# Altium PCB PCB1.PcbDoc
Units mil, origin at the board's own origin, x right, y up, seen from the top; angles counter-clockwise.
Board outline 984.25 x 984.25 mil, 2 copper layers (Top Layer, Bottom Layer); 60 components, 53 nets, 239 pads, 136 vias.
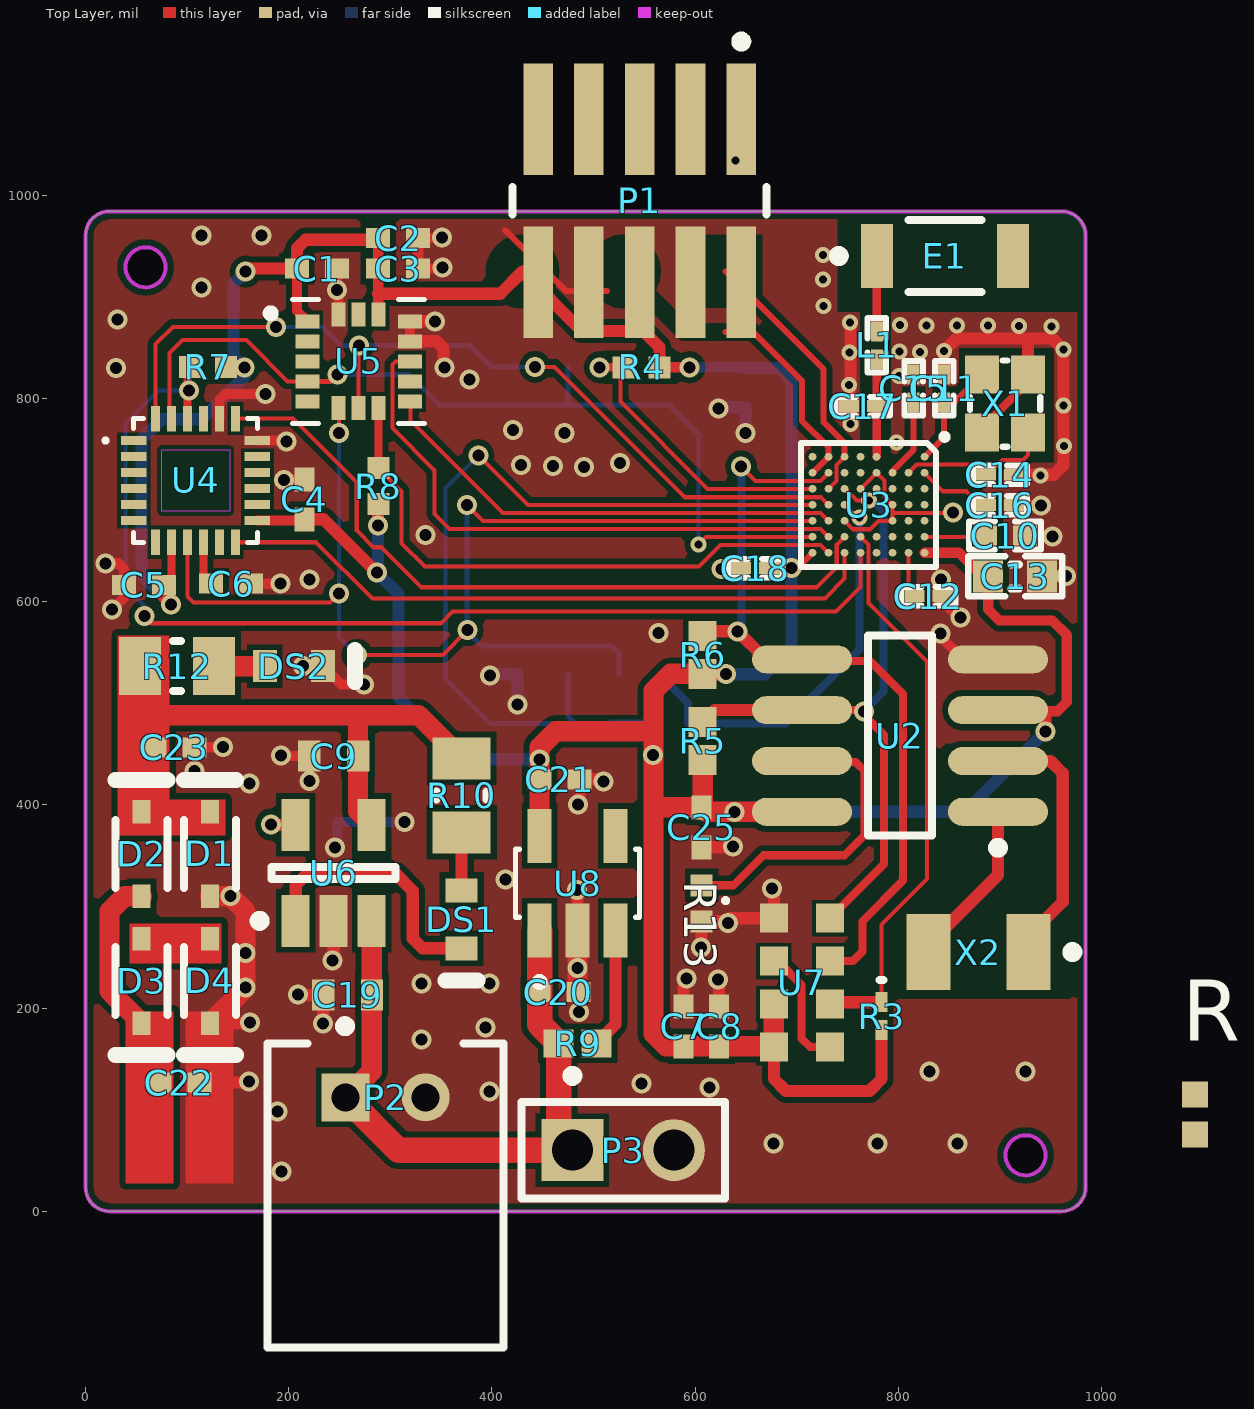
[diagram p0: Top Layer view]
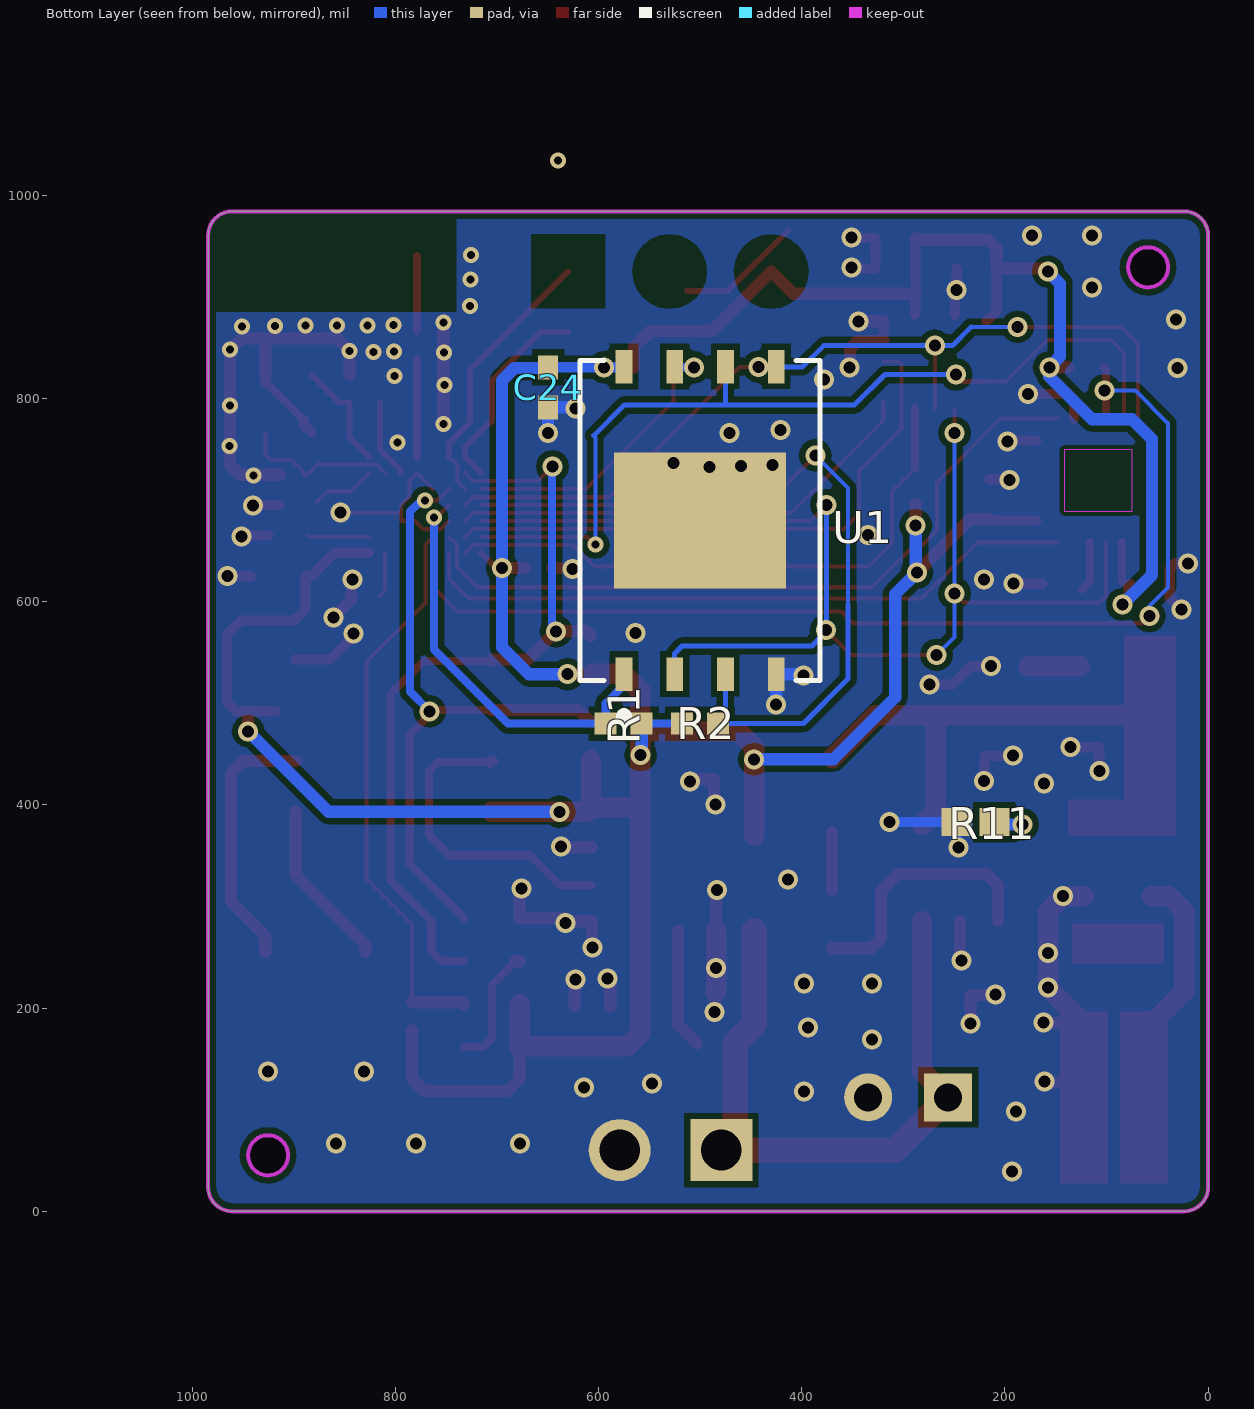
[diagram p1: Bottom Layer view, seen from below]

## Layer stack, top to bottom
Top Solder: solder mask 0.4, Solder Resist, Dk 3.5
Top Layer: signal copper 1.4
Dielectric1: dielectric 12.6, FR-4, Dk 4.8
Bottom Layer: signal copper 1.4
Bottom Solder: solder mask 0.4, Solder Resist, Dk 3.5

## Board outline
0,23.62 0,960.63 cw(c23.62,960.63) 23.62,984.25 960.63,984.25 cw(c960.63,960.63) 984.25,960.63 984.25,23.62 cw(c960.63,23.62) 960.63,0 23.62,0 cw(c23.62,23.62)
cut-out: 905.51,55.12 ccw(c925.2,55.12) 925.2,35.43 ccw(c925.2,55.12) 944.88,55.12 ccw(c925.2,55.12) 925.2,74.8 ccw(c925.2,55.12)
cut-out: 59.06,909.45 cw(c59.06,929.13) 39.37,929.13 cw(c59.06,929.13) 59.06,948.82 cw(c59.06,929.13) 78.74,929.13 cw(c59.06,929.13)

## Design rules (kind name [scope] priority, off if disabled: settings)
Clearance Clearance_1 [InComponentClass('p')] p1: gap=3.94 ignorepadtopadclearanceinfootprint=FALSE except(0: Arc-Hole Track-Hole SMDPad-Hole THPad-Hole Via-Hole Fill-Hole Poly-Hole Region-Hole Text-Hole)
Clearance [All] p2: gap=5.91 ignorepadtopadclearanceinfootprint=FALSE except(0: Arc-Hole Track-Hole SMDPad-Hole THPad-Hole Via-Hole Fill-Hole Poly-Hole Region-Hole Text-Hole)
PolygonConnect [All] p1: connectstyle=Direct reliefconductorwidth=10 reliefentries=4 polygonreliefangle="90 Angle" airgapwidth=10
RoomDefinition "SimPL_IMU_v1_1 _OCT31" [InComponentClass('SimPL_IMU_v1_1 _OCT31')] p1: confinementstyle=ConfineIn formatcopy=TRUE lockcomponents=FALSE outline 1029.25,55.01 1209.35,55.01 1209.35,249.83 1029.25,249.83
RoomDefinition "SimPL_IMU_v1_0 _OCT31" [InComponentClass('SimPL_IMU_v1_0 _OCT31')] p2: confinementstyle=ConfineIn formatcopy=TRUE lockcomponents=FALSE outline -2480,-2300 -480,-2300 -480,-1300 -2480,-1300
RoutingVias [All] p1: holewidth=11.81 width=19.68 viastyle="Through Hole" minholewidth=11.81 minwidth=19.68 maxholewidth=11.81 maxwidth=19.68
SilkToSolderMaskClearance SilkscreenOverComponentPads [IsPad] p1: minsilkscreentomaskgap=10 clearancetoexposedcopper=TRUE
SolderMaskExpansion [All] p1: expansion=4
Width [All] p1: maxlimit=1000 minlimit=4 preferedwidth=10
29 further rules are at their usual default settings.

## Classes and differential pairs
component class "SimPL_IMU_v1_1 _OCT31": C10 C11 C12 C13 C14 C15 C16 C17 C18 C24 C25 C? E1 L1 P1 R1 R2 R4 R5 R6 R13 R14 U1 U2 U3 X1 X2
component class "SimPL_IMU_v1_0 _OCT31": C1 C2 C3 C4 C5 C6 C7 C8 C9 C19 C20 C21 C22 C23 D1 D2 D3 D4 DS1 DS2 P2 P3 R3 R7 R8 R9 R10 R11 R12 U4 U5 U6 U7 U8

## Components (designator, comment, footprint, x,y, rotation, side; value= is the part's Value field where it differs from the comment)
C1 "0.1uF" 0402 227.72,927.87 r0 top
C2 "0.1uF" 0402 307.72,957.87 r0 top
C3 "1.0uF" 0402 307.72,927.87 r0 top
C4 "0.1uF" 0402 215.39,700.79 r90 top
C5 "0.1uF" 0402 57.48,616.54 r180 top
C6 "0.1uF" 0402 143.31,617.72 r0 top
C7 "0.1uF" 0402 588.52,181.99 r90 top
C8 "2.2uF" 0402 623.52,181.99 r90 top
C9 "4.7uF" CAPC1005X65X10ML15 244.17,448.03 r0 top
C10 "1.0µF" CAPC1005X04L 905,665 r180 top
C11 "12pF" CAPC0603X03L 845,810 r270 top
C12 "100nF" CAPC0603X03L 829.53,605.51 r0 top
C13 "4.7µF" CAPC1608X06L 915,625 r0 top
C14 "12pF" CAPC0603X03L 900,725 r180 top
C15 "100pF" CAPC0603X03L 815,810 r90 top
C16 "100pF" CAPC0603X03L 900,695 r180 top
C17 "1.0pF" CAPC0603X03L 764.96,792.52 r0 top
C18 "100nF" CAPC0603X03L 659.06,633.07 r180 top
C19 "4.7uF" CAPC1005X65X10ML15 257.87,212.99 r0 top
C20 "1uF" 0402 465.35,215.75 r0 top
C21 "1uF" 0402 466.54,425.2 r0 top
C22 "6.8nF" 0402 92.4,126.65 r0 top
C23 "220uF" 0402 87.4,456.65 r0 top
C24 "0.1uF" 0402 649.61,811.02 r270 bottom
C25 "2.2uF" 0402 606.3,377.95 r270 top
D1 "1N4148WS" DIOD-SOD323-2-A_V 122.4,351.65 r90 top
D2 "1N4148WS" DIOD-SOD323-2-A_V 55.16,351.65 r90 top
D3 "1N4148WS" DIOD-SOD323-2-A_V 55.16,226.77 r270 top
D4 "1N4148WS" DIOD-SOD323-2-A_V 122.4,226.65 r270 top
DS1 "red LED" VISH-TLMS1000_V 370.08,287.4 r270 top
DS2 "red LED" VISH-TLMS1000_V 205,536.5 r0 top
E1 "2450AT18A100E" JT-2450AT18A100-2_V 845.67,940.16 r0 top
L1 "3.3nH" INDC0603X03L 778.74,852.36 r90 top
P1 "10pin header" SMTC-FTSH-105-01-L-DV_V 545.35,994.58 r180 top
P2 "Battery Header" JST-S2B-PH-K-S_V 295.28,15.75 r0 top
P3 "2pin header" AMPH-68000-102HLF_V 529.13,60.24 r0 top
R1 "10k" RESC1005X40X25NL05T05 575.2,479.92 r180 bottom
R2 "10k" RESC1005X40X25NL05T05 500,480 r0 bottom
R3 "8.2k" 0603 783.52,191.99 r270 top
R4 "10k" RESC1005X40X25NL05T05 547.24,830.71 r0 top
R5 "2.2K" RESC1005X40X25ML10T10 607.36,462.64 r270 top
R6 "2.2K" RESC1005X40X25ML10T10 607.36,547.64 r270 top
R7 "10k" RESC1005X40X25NL05T05 120.39,830.79 r0 top
R8 "10k" RESC1005X40X25NL05T05 288.19,713.78 r270 top
R9 "2.2K" RESC1005X40X25ML10T10 484.25,165.35 r180 top
R10 "330" RESC2013X50X30NL20T20 370.08,409.45 r90 top
R11 "2.2K" RESC1005X40X25ML10T10 229.17,383.03 r180 bottom
R12 "330" RESC2013X50X30NL20T20 90,536.5 r180 top
R13 "1k" RESC1005X40X25NL05T05 606.3,303.15 r90 top
R14 "100k" RESC1005X40X25ML05T05 1092.06,95.31 r90 top
U1 "MT25QL256ABA1EW9-0SIT" *SON127P600X800X80-9N 500,680 r90 bottom
U2 "DS1388Z-33+T&R" S8+4_M 801.54,468.23 r180 top
U3 "nRF52832-CIAA" BGA50C40P7X8_295X322X50 770.63,695.35 r270 top
U4 "ICM-20649" *QFN40P300X300X95-24N 108.27,719.29 r0 top
U5 "ADXL372BCCZ-RL7" *PQFN50P322X300X114-16N 268.78,836.57 r0 top
U6 "MCP73831T-2ATI/OT" SOT-23-OT5_M 244.17,333.03 r90 top
U7 "VCNL4040M3OE" *VISHAY_VCNL4040_4X2X1.1 705,225 r0 top
U8 "AP2112K-3.3TRG1" *SOT95P285X140-5N 484.25,322.83 r90 top
X1 "32MHz" BT-XTAL_2016 905,795 r90 top
X2 "32.768KHz-T" ABRA-ABS07-2_V 878.74,255.12 r180 top

## Footprints (in the part's own frame and the unit in brackets; to place one, negate y for a bottom-side part, rotate by r counter-clockwise, add the part's x,y. Pads: shape width x height; smd on the part's side, far side on the other; paste and mask are expansions set on the pad)
0402 [mm] "Chip Capacitor, Body 1.0x0.5mm, IPC High Density"
  rect 0.6x0.5 smd: 1(-0.5,0) 2(0.5,0)
  body extent -0.55,-0.3 0.55,0.3, height 1.3
0603 [mm] "Chip Inductor, Body 0.6x0.3mm, IPC High Density"
  rect 0.5x0.3 smd: 1(-0.35,0) 2(0.35,0)
  silkscreen extent -0.9,-0.05 -0.9,0.05, body extent -0.33,-0.18 0.33,0.18, height 0.55
*PQFN50P322X300X114-16N [mm]
  rect 0.6x0.35 smd: 1(-1.285,1) 2(-1.285,0.5) 3(-1.285,0) 4(-1.285,-0.5) 5(-1.285,-1) 9(1.285,-1) 10(1.285,-0.5) 11(1.285,0) 12(1.285,0.5) 13(1.285,1)
  rect 0.35x0.6 smd: 6(-0.5,-1.165) 7(0,-1.165) 8(0.5,-1.165) 14(0.5,1.165) 15(0,1.165) 16(-0.5,1.165)
  silkscreen extent -2.3,-1.55 1.65,1.55
*QFN40P300X300X95-24N [mm]
  rect 0.64x0.22 smd: 1(-1.545,1) 2(-1.545,0.6) 3(-1.545,0.2) 4(-1.545,-0.2) 5(-1.545,-0.6) 6(-1.545,-1) 13(1.545,-1) 14(1.545,-0.6) 15(1.545,-0.2) 16(1.545,0.2) 17(1.545,0.6) 18(1.545,1)
  rect 0.22x0.64 smd: 7(-1,-1.545) 8(-0.6,-1.545) 9(-0.2,-1.545) 10(0.2,-1.545) 11(0.6,-1.545) 12(1,-1.545) 19(1,1.545) 20(0.6,1.545) 21(0.2,1.545) 22(-0.2,1.545) 23(-0.6,1.545) 24(-1,1.545)
  Keep-Out Layer region: -0.85,0.77 0.85,0.77 0.85,-0.77 -0.85,-0.77
  Keep-Out Layer region: -0.85,0.77 0.85,0.77 0.85,-0.77 -0.85,-0.77
  Keep-Out Layer region: -0.85,0.77 0.85,0.77 0.85,-0.77 -0.85,-0.77
  Keep-Out Layer region: -0.85,0.77 0.85,0.77 0.85,-0.77 -0.85,-0.77
  Keep-Out Layer region: -0.85,0.77 0.85,0.77 0.85,-0.77 -0.85,-0.77
  Keep-Out Layer region: -0.85,0.77 0.85,0.77 0.85,-0.77 -0.85,-0.77
  silkscreen extent -2.3,-1.55 1.55,1.55
*SON127P600X800X80-9N [mm]
  rect 0.84x0.42 smd: 1(-3.845,1.905) 2(-3.845,0.635) 3(-3.845,-0.635) 4(-3.845,-1.905) 5(3.845,-1.905) 6(3.845,-0.635) 7(3.845,0.635) 8(3.845,1.905)
  rect 3.4x4.3 smd: 9(0,0)
  silkscreen extent -4.99,-3 4,3
*SOT95P285X140-5N [mm]
  rect 1.35x0.6 smd: 1(-1.185,0.95) 2(-1.185,0) 3(-1.185,-0.95) 4(1.185,-0.95) 5(1.185,0.95)
  silkscreen extent -2.57,-1.55 0.85,1.55
*VISHAY_VCNL4040_4X2X1.1 [mm]
  rect 0.7x0.725 smd: 1(-0.7,1.613) 2(-0.7,0.537) 3(-0.7,-0.537) 4(-0.7,-1.613) 5(0.7,-1.613) 6(0.7,-0.537) 7(0.7,0.537) 8(0.7,1.613)
  silkscreen extent -1.96,2 -1.86,2.1
ABRA-ABS07-2_V [mm] "Hand Drawn, 2-Leads, Body 3.2x1.5mm, Pitch 2.5mm"
  rect 1.1x1.9 smd: 1(-1.25,0) 2(1.25,0)
  silkscreen extent -2.48,-0.12 -2.23,0.12, body extent -1.6,-0.75 1.6,0.75, height 0.9
AMPH-68000-102HLF_V [mm] "THD, 2-Leads, Body 5.08x2.41mm, Pitch 2.54mm"
  rect 1.55x1.55 hole 1.02: 1(-1.27,0)
  round 1.55 hole 1.02: 2(1.27,0)
  silkscreen extent -2.54,-1.2 2.54,1.98, body extent -2.54,-1.2 2.54,1.2, height 8.38
BGA50C40P7X8_295X322X50 [mm]
  round 0.193 smd: A1(-1.2,1.4) A2(-0.8,1.4) A3(-0.4,1.4) A4(0,1.4) A5(0.4,1.4) A6(0.8,1.4) A7(1.2,1.4) B2(-0.8,1) B3(-0.4,1) B4(0,1) B5(0.4,1) B6(0.8,1) B7(1.2,1) C2(-0.8,0.6) C3(-0.4,0.6) C4(0,0.6) C5(0.4,0.6) C6(0.8,0.6) C7(1.2,0.6) D1(-1.2,0.2) D2(-0.8,0.2) D3(-0.4,0.2) D6(0.8,0.2) D7(1.2,0.2) E1(-1.2,-0.2) E2(-0.8,-0.2) E3(-0.4,-0.2) E6(0.8,-0.2) E7(1.2,-0.2) F1(-1.2,-0.6) F2(-0.8,-0.6) F3(-0.4,-0.6) F4(0,-0.6) F5(0.4,-0.6) F6(0.8,-0.6) F7(1.2,-0.6) G1(-1.2,-1) G2(-0.8,-1) G3(-0.4,-1) G4(0,-1) G5(0.4,-1) G6(0.8,-1) G7(1.2,-1) H1(-1.2,-1.4) H2(-0.8,-1.4) H3(-0.4,-1.4) H4(0,-1.4) H5(0.4,-1.4) H6(0.8,-1.4) H7(1.2,-1.4)
  silkscreen extent -1.75,-1.69 1.55,1.95, body extent -1.48,-1.61 1.48,1.61, height 0.51
BT-XTAL_2016 [mm]
  rect 0.95x0.85 smd: 1(-0.725,-0.575) 2(0.725,-0.575) 3(0.725,0.575) 4(-0.725,0.575)
  silkscreen extent -1.08,-0.88 1.08,0.88, body extent -1.05,-0.85 1.05,0.85, height 0.56
CAPC0603X03L [mm]
  rect 0.5x0.3 smd: 1(-0.35,0) 2(0.35,0)
  silkscreen extent -0.68,-0.23 0.68,0.23, body extent -0.3,-0.15 0.3,0.15, height 0.3
CAPC1005X04L [mm]
  rect 0.6x0.5 smd: 1(-0.5,0) 2(0.5,0)
  silkscreen extent -0.9,-0.35 0.9,0.35, body extent -0.51,-0.25 0.51,0.25, height 0.5
CAPC1005X65X10ML15 [mm] "Chip Capacitor, 2-Leads, Body 1.15x0.65mm, IPC Low Density"
  rect 0.56x0.78 smd: 1(-0.61,0) 2(0.61,0)
  body extent -0.57,-0.33 0.58,0.32, height 0.65
CAPC1608X06L [mm]
  rect 0.75x0.8 smd: 1(-0.675,0) 2(0.675,0)
  silkscreen extent -1.17,-0.5 1.17,0.5, body extent -0.8,-0.43 0.8,0.43, height 0.8
DIOD-SOD323-2-A_V [mm] "SOD-323, 2-Leads, Body 1.7x1.3mm"
  rect 0.59x0.45 smd: 1(-1.055,0) 2(1.055,0)
  silkscreen extent -0.85,-0.65 1.85,0.65, body extent -0.85,-0.65 0.85,0.65, height 1.2
INDC0603X03L [mm]
  rect 0.5x0.3 smd: 1(-0.35,0) 2(0.35,0)
  silkscreen extent -0.68,-0.23 0.68,0.23, body extent -0.31,-0.16 0.31,0.16, height 0.26
JST-S2B-PH-K-S_V [mm] "THD, 2-Leads, Body 7.6x5.9mm, Pitch 2mm"
  rect 1.2x1.2 hole 0.7: 1(-1,2.45)
  round 1.2 hole 0.7: 2(1,2.45)
  silkscreen extent -2.95,-3.8 2.95,4.35, body extent -2.95,-3.8 2.95,3.8, height 4.8
JT-2450AT18A100-2_V [mm] "Chip Antenna, 2-Leads, Body 3.4x1.8mm"
  rect 0.8x1.6 smd: 1(-1.7,0) 2(1.7,0)
  silkscreen extent -2.77,-0.9 0.91,0.9, body extent -1.7,-0.9 1.7,0.9, height 1.4
RESC1005X40X25ML05T05 [mm] "Chip Resistor, 2-Leads, Body 1.05x0.55mm, IPC Low Density"
  rect 0.65x0.65 smd: 1(-0.5,0) 2(0.5,0)
  body extent -0.53,-0.28 0.53,0.28, height 0.4
RESC1005X40X25ML10T10 [mm] "Chip Resistor, 2-Leads, Body 1.00x0.50mm, IPC Low Density"
  rect 0.75x0.7 smd: 1(-0.475,0) 2(0.475,0)
  body extent -0.55,-0.3 0.55,0.3, height 0.4
RESC1005X40X25NL05T05 [mm] "Chip Resistor, 2-Leads, Body 1.05x0.55mm, IPC Medium Density"
  rect 0.55x0.55 smd: 1(-0.45,0) 2(0.45,0)
  body extent -0.53,-0.28 0.53,0.28, height 0.4
RESC2013X50X30NL20T20 [mm] "Chip Resistor, 2-Leads, Body 2.00x1.25mm, IPC Medium Density"
  rect 1.05x1.45 smd: 1(-0.925,0) 2(0.925,0)
  silkscreen extent -0.1,-0.63 0.1,0.63, body extent -1.1,-0.72 1.1,0.72, height 0.5
S8+4_M [mm] "SOIC, 8-Leads, Body 4.9x3.9mm, Pitch 1.27mm, IPC Low Density"
  oval 2.5x0.7 smd: 1(-2.45,1.905) 2(-2.45,0.635) 3(-2.45,-0.635) 4(-2.45,-1.905) 5(2.45,-1.905) 6(2.45,-0.635) 7(2.45,0.635) 8(2.45,1.905)
  silkscreen extent -2.58,-2.5 0.8,2.93, body extent -2,-2.5 2,2.5, height 1.75
SMTC-FTSH-105-01-L-DV_V [mm] "CONN, 10-Leads, Body 6.35x3.43mm, Pitch 1.27mm"
  rect 0.74x2.79 smd: 1(-2.54,-2.035) 2(-2.54,2.035) 3(-1.27,-2.035) 4(-1.27,2.035) 5(0,-2.035) 6(0,2.035) 7(1.27,-2.035) 8(1.27,2.035) 9(2.54,-2.035) 10(2.54,2.035)
  silkscreen extent -3.17,-4.1 3.17,0.34, body extent -3.17,-2.92 3.18,2.92, height 5.96
SOT-23-OT5_M [mm] "SOT23, 5-Leads, Body 2.9x1.7mm, Pitch 0.95mm, Lead Span 2.8mm, IPC Low Density"
  rect 1.3x0.7 smd: 1(-1.2,0.95) 2(-1.2,0) 3(-1.2,-0.95) 4(1.2,-0.95) 5(1.2,0.95)
  silkscreen extent -1.32,-1.55 0.15,1.97, body extent -0.9,-1.55 0.9,1.55, height 1.45
VISH-TLMS1000_V [mm] "SMD, 2-Leads, Body 0.8x1.6mm"
  rect 0.6x0.8 smd: 1(-0.725,0) 2(0.725,0)
  silkscreen extent 1.52,-0.4 1.52,0.4, body extent -0.8,-0.4 0.8,0.4, height 0.65

## Part data
C1 C2 C4 C5 C6 C7 C8 C20 C21 C22 C23 C24 C25: library part 0.1UF-0402-16V-10%, "0.1µF ceramic capacitors    A capacitor is a passive two-terminal electrical component used to store electrical energy temporarily in an electric field.", DeviceName=-0402-16V-10%, DeviceSetName=0.1UF, GateName_1=G$1, LibraryName=SparkFun-Capacitors, PROD_ID=CAP-12416, SymbolName_1=CAP
C3: library part 1.0UF-0402-16V-10%, "1µF ceramic capacitors    A capacitor is a passive two-terminal electrical component used to store electrical energy temporarily in an electric field.", DeviceName=-0402-16V-10%, DeviceSetName=1.0UF, GateName_1=G$1, LibraryName=SparkFun-Capacitors, PROD_ID=CAP-12417, SymbolName_1=CAP
C9 C19: library part CMP-2000-05438-1, "Chip Capacitor, 4.7 uF, +/- 20%, 10 V, -55 to 85 degC, 0402 (1005 Metric), RoHS, Tape and Reel", Capacitance=4.7µF, Manufacturer=TDK, Operating Temperature=-55degC~85degC, Package / Case=0402(1005Metric), PCN Part Number=MLCCPartNumberChange30/Nov/2012, Ratings=-, Standard Package=1, Temperature Coefficient=X5R, Tolerance=±20%, Voltage - Rated=10V, Applications=GeneralPurpose, Category=Capacitors, Datasheet URL=https://datasheet.ciiva.com/24216/c1005x5r1a475m050bc-264317-24216438.pdf, Datasheet Version=Sep-13, Family=CeramicCapacitors, Features=-, Height - Seated (Max)=-, Kits=445-9021-KIT-ND-KITMLCC100PF-10UF04026.3-50V445-9003-KIT-ND-KITCAPCERHICAPMLCCSMD, Lead Spacing=-, Lead Style=-, Manufacturer URL=http://www.tdk.com/, Mounting Type=SurfaceMount,MLCC, Online Catalog=CSeries,GeneralPurpose, Other Names=445-8023-1, Packaging=CutTape(CT), Product Training Modules=CSeriesGeneralApplicationsSEAT,CCV,andTVCLDesignToolsGuidetoReplacinganElectrolyticCapacitorwithanMLCC, RoHS Information=RoHSCertificate-MLCC, Series=C, Size / Dimension="0.039\"Lx0.020\"W(1.00mmx0.50mm)", Thickness (Max)=-
C10: library part C0402-1µ0, "Capacitor, X5R, ±5%", Artikkelnr Noca=20039235, Artikkelnr Simpro=N.A., Footprint Doc=0402, LatestRevisionDate=2009-11-23, Note=6.3V, Part Number=C0402-1µ0, Pin Count=2, Published=2009-05-08, Publisher="Nordic Semiconductor"
C11 C14: library part C0201-12p, "Capacitor, NP0, ±2%", Artikkelnr Noca=N.A., Artikkelnr Simpro=N.A., Footprint Doc=0201, LatestRevisionDate=2014-11-13, Note=50V, Part Number=C0201-12p, Pin Count=2, Published=2014-11-13, Publisher="Nordic Semiconductor"
C12 C18: library part C0201-100n, "Capacitor, X7R, ±10%", Artikkelnr Noca=N.A., Artikkelnr Simpro=N.A., Footprint Doc=0201, LatestRevisionDate=2014-11-13, Note=16V, Part Number=C0201-100n, Pin Count=2, Published=2014-11-13, Publisher="Nordic Semiconductor"
C13: library part C0603-4µ7, "Capacitor, X5R, ±10%", Artikkelnr Noca=20069060, Artikkelnr Simpro=N.A., Footprint Doc=0603, LatestRevisionDate=2009-11-23, Note=6.3V, Part Number=C0603-4µ7, Pin Count=2, Published=2009-05-08, Publisher="Nordic Semiconductor"
C15 C16: library part C0201-100p, "Capacitor, NP0, ±5%", Artikkelnr Noca=N.A., Artikkelnr Simpro=N.A., Footprint Doc=0201, LatestRevisionDate=2014-11-13, Note="Chip Cap 1%", Part Number=C0201-100p, Pin Count=2, Published=2014-11-13, Publisher="Nordic Semiconductor"
C17: library part C0201-1.0p, "Capacitor, NP0, ±5%", Artikkelnr Noca=N.A., Artikkelnr Simpro=N.A., Footprint Doc=0201, LatestRevisionDate=2014-11-13, Note="Chip Cap 1%", Part Number=C0201-1.0p, Pin Count=2, Published=2014-11-13, Publisher="Nordic Semiconductor"
D1 D2 D3 D4: library part CMP-1667-00004-1, "Fast Switching Diode, 75 V, 0.3 A, -65 to 150 degC, 2-Pin SOD323, RoHS, Tape and Reel", ComponentLink1Description="Manufacturer URL", ComponentLink1URL=http://www.diodes.com/, ComponentLink2Description=Datasheet, ComponentLink2URL=http://www.diodes.com/datasheets/ds30097.pdf, DatasheetVersion="Rev. 25-2, 03/2016", PackageDescription="2-Pin Small Outline Diode, Body 1.7 x 1.3 mm", PackageReference=SOD323-2
DS1 DS2: library part CMP-2000-07254-1, "Low Current LED, 40 mW, 1.8 V, -40 to 100 degC, 2-Pin SMD (0603), RoHS, Tape and Reel", Forward Current If=2mA, Forward Voltage=1.8V, LED Colour=Red, Manufacturer=Vishay, Package Description="2-Pin Surface Mount Device, Body 1.6 x 0.8 mm", Package Reference=TLMS1000, Automotive Qualification Standard=AEC-Q100, Bulb Size=1.6mmx0.8mm, Datasheet URL=https://datasheet.ciiva.com/5798/1698881-5798337.pdf, Datasheet Version="Rev. 1.7, 02/2011", LED Mounting=SMD, Lens Shape=Rectangular, Luminous Intensity=4mcd, Manufacturer URL=http://www.vishay.com/, Mounting Technology=SurfaceMount, MSL=MSL2-1year, Packaging=CutTape, Product Range=-, SVHC=ToBeAdvised, Viewing Angle=80°, Wavelength Typ=636nm
E1: library part CMP-2000-05167-1, "Ceramic Antenna, 2.45 GHZ, 2 W, -40 to 125 degC, 2-Pin SMD, RoHS, Tape and Reel", Manufacturer="Johanson Technology", Maximum Frequency=2500MHz, Minimum Frequency=2400MHz, Package=2Case18-4, Category=Antenna, Datasheet URL=http://www.johansontechnology.com/datasheets/antennas/2450AT18A100.pdf, Datasheet Version="Rev. 1.3, 07/2014", Manufacturer URL=https://www.johansontechnology.com/, Type=Ceramic, Typical Antenna Gain=0.5dB
L1: library part L0201-3n3, "High frequency chip inductor ±5%", Artikkelnr Noca=N.A., Artikkelnr Simpro=N.A., Footprint Doc=0201, LatestRevisionDate=2013-04-10, Note="High frequency chip inductor ±5%", Part Number=L0201-3n3, Pin Count=2, Published=2013-04-10, Publisher="Nordic Semiconductor"
P1: library part CMP-2000-05354-1, "Male Header, Pitch 1.27 mm, 2 x 5 Position, Height 5.96 mm, -55 to 125 degC, RoHS, Bulk", Color=Black, Manufacturer=Samtec, Standard Package=1, Catalog Drawings=FTSHSeriesFTSHSeriesSMTSide, Category=Connectors,Interconnects, Connector Type=Header,Unshrouded, Contact Finish=Gold, Contact Finish Thickness=10µin(0.25µm), Contact Mating Length="0.120\"(3.05mm)", Contact Type=MalePin, Datasheet URL=https://datasheet.ciiva.com/30493/0900766b80adfe36-30493006.pdf, Datasheet Version=Feb-08, EDA / CAD Models=DownloadfromAcceleratedDesigns, Family=RectangularConnectors-Headers,MalePins, Fastening Type=-, Featured Product=Board-To-BoardInterconnectSystems, Features=-, Manufacturer URL=http://www.samtec.com/, Mating Products="FLE-105-01-G-DV-TR-ND-CONNSKT1.27MM10POSDUALSMDCLP-105-02-G-D-P-TR-ND-CONNRCPT10POSDUAL.05\"SMDSFMC-105-L2-S-D-TR-ND-CONN.05\"SURFACE10POSSMTSFMH-105-02-L-D-TR-ND-CONNRECEPT10POS.50\"SMTFLE-105-01-G-DV-A-ND-CONNSKT1.27MM10POSDUALSMDCLP-105-02-G-D-BE-ND-CONNRCPT10POSDUAL.05\"SMDFLE-105-01-G-DV-A-P-ND-CONNSKT1.27MM10POSDUALSMDSAM1153-05-ND-CONNRCPT10POSDUAL.05\"SMDSAM1155-05-ND-CONNRCPT10POSDUAL.05\"SMDSAM1154-05-ND-CONNRCPT10POSDUAL.05\"SMDSFMH-105-02-L-D-LC-ND-CONNRECEPT10POS.50\"SMTSAM1226-05-ND-CONNRCPT.05\"10POSDUALSMD", Mounting Type=SurfaceMount, Number of Positions=10, Number of Positions Loaded=All, Number of Rows=2, Online Catalog=FTSHSeries, Other Names=SAM1161-05, Packaging=Bulk, Pitch="0.050\"(1.27mm)", Product Training Modules=Board-to-BoardConnectors, Row Spacing="0.050\"(1.27mm)", Series=FTSH, Termination=Solder
P2: library part CMP-1755-00004-1, "Male Header, Pitch 2 mm, 1 x 2 Position, Height 4.8 mm, Tail Length 3.4 mm, -25 to 85 degC, RoHS, Bulk", Capacitance="10 uF", Case\Package=Radial, Max Operating Temperature="85 degC", Min Operating Temperature="-40 degC", Package Quantity=200, Tolerance=20%, Voltage Rating="50 V", ComponentLink1Description=Datasheet, ComponentLink1URL=http://www.jst-mfg.com/product/pdf/eng/ePH.pdf, DatasheetVersion=Dec-12, Diameter="5 mm", Height="11 mm", Lead Pitch="2 mm", Length="11 mm", Mount="Through Hole", PackageDescription="Male Header, Pitch 2 mm, 1 x 2 Position, Height 4.8 mm, Tail Length 3.4 mm", PackageReference=S2B-PH-K-S, Packaging=Bulk, Pins=2, Radiation Hardening=No, REACH SVHC="No SVHC", RoHSCompliant=true, Voltage Rating (DC)="50 V"
P3: library part CMP-2000-05666-1, "Male Header, Pitch 2.54 mm, 1 x 2 Position, Height 8.38 mm, Tail Length 2.41 mm, RoHS, Bulk", Current Rating=3A, Flammability Rating=UL94V-0, Insulation Resistance=5000MOhms, Manufacturer=FCI, Operating Temperature Range=-65Cto+125C, Package Description="Male Header, Pitch 2.54 mm, 1 x 2 Position, Height 8.38 mm, Tail Length 2.41 mm", Package Reference=68000-102HLF, Voltage Rating=1.5kV, Brand=FCI, Contact Gender=Pin(Male), Contact Material=PhosphorBronze, Contact Plating=Gold/GTX, Datasheet URL=https://datasheet.ciiva.com/5149/68000-274228-5149165.pdf, Datasheet Version="Rev. F, 04/2006", Factory Pack Quantity=100, Housing Material=Thermoplastic, Manufacturer URL=http://www.amphenol.com/, Mating Post Length=5.84mm, Mounting Angle=Vertical, Mounting Style=ThroughHole, Mounting Technology=ThroughHole, Number of Positions=2, Number of Positions / Contacts=2, Number of Rows=1, Packaging=Bulk, Pitch=2.54mm, Product Category=Headers&WireHousings, Product Type=Headers, RoHS=Details, Series=68000, Termination Post Length=2.41mm, Termination Style=ThroughHole, Type=Unshrouded
R1 R2 R4 R7 R8: library part CMP-2002-00607-3, "Chip Resistor, 10 KOhm, +/- 1%, 100 mW, -55 to 155 degC, 0402 (1005 Metric), RoHS, Tape and Reel", Case\/Package=0402, Case Code (Metric)=1005, Manufacturer="Basic Passives", Max Operating Temperature="155 degC", Min Operating Temperature="-55 degC", Package Quantity=10000, PartNumber=ERJ-2RKF1002X, Power Rating="100 mW", Resistance="10 KOhm", Tolerance=1%, Voltage Rating="50 V", Case Code (Imperial)=0402, ComponentLink1Description="Manufacturer URL", ComponentLink1URL=http://www.panasonic.com/, ComponentLink2Description=Datasheet, ComponentLink2URL=http://industrial.panasonic.com/cdbs/www-data/pdf/RDA0000/AOA0000C86.pdf, DatasheetVersion=04/2015, Height="0.35 mm", Length="1 mm", Mount="Surface Mount", Mounting Technology="Surface Mount", PackageDescription="2-Pin Surface Mount Device, Body 1 x 0.5 mm", PackageReference=0402, Packaging="Tape and Reel", Pins=2, Radiation Hardening=No, REACH SVHC=Yes, RoHSCompliant=true, Width="0.5 mm"
R3: library part 8.2KOHM-0603-1/10W-5%, "8.2kΩ resistor    A resistor is a passive two-terminal electrical component that implements electrical resistance as a circuit element. Resistors act to reduce current flow, and, at the same time, act to lower voltage levels within circuits. - Wikipedia", DeviceName=-0603-1/10W-5%, DeviceSetName=8.2KOHM, GateName_1=G$1, LibraryName=SparkFun-Resistors, PROD_ID=RES-10646, SymbolName_1=RESISTOR
R5 R6 R9 R11: library part CMP-2002-06097-1, Manufacturer=Multicomp, Part Number=MC00625W040212K2
R10 R12: library part CMP-2001-03823-1, Manufacturer="Vishay Dale", Part Number=CRCW0805330RFKEA
R13: library part CMP-2002-08276-1, Manufacturer="Vishay Dale", Part Number=CRCW04021K00FKED
R14: library part CMP-2002-08123-2, "Chip Resistor, 100 KOhm, +/- 1%, 0.63 W, -55 to 155 degC, 0402 (1005 Metric), RoHS, Tape and Reel", Case\Package=0402, Case Code (Metric)=1005, Max Operating Temperature="155 degC", Min Operating Temperature="-55 degC", Package Quantity=10000, Power Rating="63 mW", Resistance="100 kohm", Tolerance=1%, Type (Resistor)="Thick Film", Voltage Rating="50 V", Case Code (Imperial)=0402, ComponentLink1Description="Manufacturer URL", ComponentLink1URL=http://www.vishay.com/, ComponentLink2Description=Datasheet, ComponentLink2URL=http://www.vishay.com/docs/20035/dcrcwe3.pdf, DatasheetVersion=06/2012, Height="0.35 mm", Length="1 mm", Mount="Surface Mount", Mounting Technology="Surface Mount", PackageDescription="2-Pin Surface Mount Device, Body 1 x 0.5 mm", PackageReference=0402, Packaging="Tape and Reel", Pins=2, Radiation Hardening=No, REACH SVHC=Unknown, RoHSCompliant=true, Weight="2.3E-05 oz", Width="0.5 mm"
U1: "NOR Flash Serial-SPI 3.3V 256Mbit 256M x 1bit 8-Pin WPDFN", Package="WDFN-8 Micron Technology", Availability=Unavailable, MF="Micron Technology", MP=MT25QL256ABA1EW9-0SIT, Price=None, SnapEDA_Link=https://www.snapeda.com/parts/MT25QL256ABA1EW9-0SIT/Micron%20Technology%20Inc./view-part/?ref=snap
U2: library part CMP-0254-00385-1, "I2C Real-Time Clock/Supervisor with Trickle Charger and 512 Byte EEPROM, 3.3V, 8-Pin SO, -40 to 85 degC, Pb-Free, Reel", Code_IPC=SOIC127P600-8, Code_JEDEC=MS-012-AA, ComponentLink1Description="Manufacturer URL", ComponentLink1URL=http://www.maxim-ic.com, ComponentLink2Description=Datasheet, ComponentLink2URL=http://datasheets.maxim-ic.com/en/ds/DS1388.pdf, ComponentLink3Description="Package Specification", ComponentLink3URL=http://pdfserv.maxim-ic.com/package_dwgs/21-0041.PDF, DatasheetVersion="rev3, Aug-2010", PackageDescription="8-Pin Small-Outline IC, Narrow (0.15in), 1.27 mm Pitch, SOIC (N), Pb-Free", PackageReference=S8+4, PackageVersion="revC, 2010"
U3: "Multi-protocol Bluetooth Low Energy, ANT and 2.4GHz proprietary system-on-chip", Manufacturer="Nordic Semiconductor", Part number IPS=N.A., Artikkelnr Noca=N.A., Artikkelnr Simpro=N.A., Footprint Doc=WLCSP_C50, LatestRevisionDate=2016-03-11, Manufacturer Part Number=nRF52832-CIAA, Part Number=nRF52832-CIAA, Pin Count=54, Published=2016-03-11, Publisher="Nordic Semiconductor", Supplier="Nordic Semiconductor"
U4: "Wide-Range 6-Axis MEMS MotionTracking Device for Sports and High Impact Applications", Package="QFN-24 InvenSense", Availability=Unavailable, MF="TDK InvenSense", MP=ICM-20649, Price=None, SnapEDA_Link=https://www.snapeda.com/parts/ICM-20649/TDK%20InvenSense/view-part/?ref=snap
U5: "Accelerometer Triple ±200g 2.5V 16-Pin LGA T/R", Package="LGA-16 Analog Devices", Availability=Unavailable, MF="Analog Devices", MP=ADXL372BCCZ-RL7, Price=None, SnapEDA_Link=https://www.snapeda.com/parts/ADXL372BCCZ-RL7/Analog%20Devices%20Inc./view-part/?ref=snap
U6: library part CMP-0133-00144-1, "Miniature Single-Cell, Fully Integrated Li-Ion, Li-Polymer Charge Management Controller, 4.2V, 5-Pin SOT-23, Industrial Temperature, Tape and Reel", Code_IPC=SOT23-5, DatasheetVersion="revE, Sep-2008", PackageDescription="5-Lead Plastic Small Outline Transistor (OT) [SOT-23]", PackageReference=SOT-23-OT5, PackageVersion="revBB, Aug-2009"
U7: "VCNL4040 Series 3.6 V 200 mm 16 Bit I2C SMT Proximity and Ambient Light Sensor", Package="SMD-8 Vishay", Availability=Unavailable, MF=Vishay, MP=VCNL4040M3OE, Price=None, SnapEDA_Link=https://www.snapeda.com/parts/VCNL4040M3OE/Vishay%20Semiconductor%20Opto%20Division/view-part/?ref=snap
U8: "AP2112 Series 0.6 A 3.3 V Fixed Output SMT LDO Linear Regulator - SOT23-5", Package="SOT-753 Diodes Inc.", Availability=Unavailable, MF="Diodes Inc.", MP=AP2112K-3.3TRG1, Price=None, SnapEDA_Link=https://www.snapeda.com/parts/AP2112K-3.3TRG1/Diodes%20Inc./view-part/?ref=snap
X1: library part XTAL_SMD2016_32MHz_8pF_Epson, "XTAL SMD 2016, 32MHz, Cl=8pF, Total Tol: ±40ppm", Manufacturer="Epson Toyocom", Manufacturer Part Number=Q22FA12800025, Supplier part number=171-2806, Artikkelnr Noca=N.A., Artikkelnr Simpro=N.A., Datasheet=http://www.epsondevice.com/docs/qd/en/DownloadServlet?id=ID000449, Footprint Doc=XTAL_2016, LatestRevisionDate=2014-11-27, Note="XTAL SMD 32.000MHz", Part Number=XTAL_SMD2016_32MHz_8pF_Epson, Pin Count=4, Published=2012-03-09, Publisher="Nordic Semiconductor", Supplier=Farnell
X2: library part CMP-0447-00001-2, "Crystal, 32.768 kHz, 12.5 pF, -40 to 85 degC, SMD Low Profile 3.2 x 1.5 x 0.9 mm, Tape and Reel", Equivalent Series Resistance (R1)="70 Kohm", Frequency="32.768 kHz", Frequency Tolerance @+25degC="+/- 20 ppm", Insulation Resistance (Min)="500 Mohm", Load Capacitance (CL)="12.5 pF", Manufacturer=Abracon, Operating Temperature="-40 to 85 degC", PartNumber=ABS07-32.768KHz-T, Q Value (Type)=30000, Shunt Capacitance (C0)="0.9 to 1.2 pF", ComponentLink1Description="Manufacturer URL", ComponentLink1URL=http://www.abracon.com/, ComponentLink2Description=Datasheet, ComponentLink2URL=http://www.abracon.com/Resonators/ABS07.pdf, ComponentLink3Description="Package Specification", ComponentLink3URL=http://www.abracon.com/Resonators/ABS07.pdf, DatasheetVersion=04.03.13, Drive Level (Type)="0.1 uW", Mounting Technology="Surface Mount", Operation Mode="Flexural Mode (Tuning Fork)", PackageDescription="2-Pin Hand Drawn, Body 3.2x1.5mm, Pitch 2.5mm", PackageReference=ABS07-2, Packing="Tape and Reel"

## Via types
v1: diameter 19.68, hole 11.81, Top Layer to Bottom Layer, tented both sides, 110 vias
v2: diameter 15.75, hole 7.87, Top Layer to Bottom Layer, tented both sides, 26 vias

## Nets (pads, with @x,y where several pads share a name; then routed paths per layer and width w, separated by ;. In a path a pad name is that pad's centre, name@x,y a point inside that pad or via, vN(x,y) a via of type N, cw(c..) or ccw(c..) an arc to the next point about the centre after c; other vN are vias at no path point)
+3V3: C1.1 C2.1 C3.1 C4.1 C5.1 C7.1 C8.1 C13.1 C18.1 C21.1 C24.1 C25.1 P1.1 R1.2 R2.2 R3.2 R4.2 R5.2 R6.2 R7.2 R8.2 R14.2 U1.8 U2.3 U2.8 U3.A7 U3.H7 U4.8 U4.13 U5.1 U5.14 U7.3 U7.4 U8.5 | length 4092.6
  Top Layer w6: v1@700.47,633.07 U3.H7
  Top Layer w8: C5.1@77.17,612.99 84.65,620.47 U4.8
  Top Layer w10: U4.13 214.21,679.92 C4.1 ; C1.1 208.03,886.1 U5.1 ; C2.1 C3.1 288.03,903.15 288.03,882.87 U5.14 ; R4.2 v1(594.49,830.71) ; v1(694.88,633.07) v1@700.47,633.07 ; U3.A7 859.76,648.11 882.87,625 C13.1 888.43,592.28 899.21,581.5 951.57,581.5 965.75,567.32 965.75,501.18 956.69,492.13 944.88,492.13 U2.3@917.32,492.13
  Top Layer w12: C5.1 77.17,612.99 77.17,604.33 v1(84.25,597.24) ; R7.2 156.22,830.79 v1(156.3,830.71) ; v1(157.48,924.8) 160.55,927.87 C1.1 208.03,947.8 216.54,956.3 286.46,956.3 C2.1 ; C4.1 234.25,681.1 v1(286.61,628.74) ; v1(287.8,675.2) 287.8,695.67 R8.2 ; 288.03,903.15 408.15,903.15 430,925 488.46,866.54 548.82,866.54 564.96,850.39 R4.2 ; R6.2 607.68,528.62 v1(630.32,528.62) ; C18.1 v1(694.88,633.07) ; U7.4 677.44,130.43 689.37,118.5 771.65,118.5 783.52,130.37 R3.2 ; v1(944.88,472.44) U2.3@944.88,492.13
  Top Layer w20: U8.5 C21.1 v1(446.85,444.88) 446.85,456.69 462.6,472.44 559.06,472.44 ; R5.2 607.36,398.7 C25.1 ; R6.2 575.79,528.94 559.06,512.2 559.06,472.44 ; U7.3 U7.4 676.65,162.3 C8.1 C7.1 571.55,162.3 559.06,174.8 559.06,393.7 ; U2.8 v1(638.58,393.23) 610.71,393.23 C25.1 ; 559.06,393.7 559.06,472.44 ; 559.06,393.7 562.99,397.64 C25.1
  Bottom Layer w8: R2.2 557.4,480 R1.2
  Bottom Layer w10: U1.8 575.67,830.71 C24.1
  Bottom Layer w12: v1(84.25,597.24) 55.12,626.38 55.12,759.84 74.8,779.53 114.17,779.53 156.3,821.65 v1(156.3,830.71) 145.67,841.34 145.67,912.99 v1(157.48,924.8) ; v1(287.8,675.2) 287.8,629.92 v1(286.61,628.74) 307.87,607.48 307.87,505.91 368.9,444.88 v1(446.85,444.88) ; R1.2 557.48,450.17 v1(558.59,449.06) ; v1(630.32,528.62) 668.39,528.62 694.88,555.12 v1(694.88,633.07) 694.88,817.72 682.68,829.92 650.39,829.92 C24.1 ; v1(638.58,393.23) 865.67,393.23 v1(944.88,472.44)
  other v2: 639.76,1034.15
ACCEL_CS: R8.1 U3.G7 U5.8 | length 584.4
  Top Layer w4: R8.1 311.02,708.66 311.02,657.48 333.86,634.65 603.77,634.65 625.03,655.91 723.46,655.91 U3.G7
  Top Layer w8: R8.1@288.46,731.5 U5.8
ACCEL_INT1: U3.G6 U5.11 | length 580
  Top Layer w4: U5.11 305.08,836.57 301.97,833.46 301.97,770.87 343.5,729.33 343.5,686.42 358.27,671.65 723.46,671.65 U3.G6
ACCEL_INT2: U3.G5 U5.9 | length 471.5
  Top Layer w4: U5.9 319.72,796.85 319.72,778.31 410.63,687.4 723.46,687.4 U3.G5
CATHODE: U7.2 U7.5 | length 121.1
  Top Layer w8: U7.2@681.4,246.16 704.72,222.83 704.72,170.08 713.29,161.52 U7.5
  Top Layer w12: U7.2 U7.2@681.4,246.16
COIL1: C22.1 D2.1 D3.2 | length 160.8
  Top Layer w20: D3.2 23.62,216.77 23.62,295.28 38.46,310.12 D2.1
CS_MEM: R1.1 U1.1 U3.F4 | length 405.5
  Top Layer w4: U3.F4 760.08,682.28 760.47,682.68 v2(761.81,682.68)
  Bottom Layer w8: U1.1 575,517.91 592.91,500 R1.1 688.98,479.92 761.81,552.76 v2(761.81,682.68)
DEC1: C12.1 U3.B7 | length 45
  Top Layer w4: U3.B7 810,611.26 C12.1
DEC2: C16.2 U3.A2 | length 63.7
  Top Layer w4: U3.A2 843.94,708.66 866.93,708.66 C16.2@877.56,698.03
DEC3: C15.1 U3.C2 | length 78
  Top Layer w6: U3.C2 794.25,728.68 815,749.43 C15.1
DEC4: C10.2 U3.A6 | length 60
  Top Layer w4: U3.A6 884.17,663.86 C10.2
GND: C1.2 C2.2 C3.2 C4.2 C5.2 C6.2 C7.2 C8.2 C9.1 C10.1 C11.1 C12.2 C13.2 C14.1 C15.2 C16.1 C17.1 C18.2 C19.1 C20.2 C21.2 C22.2 C23.2 C24.2 C25.2 D1.1 D4.2 DS2.2 P1.3 P1.5 P2.2 P3.2 R11.1 R13.1 U1.4 U1.9 U2.4 U3.C4 U3.C5 U3.D2 U3.E3 U3.F5 U4.18 U4.20 U5.12 U5.13 U5.16 U6.2 U7.1 U8.2 X1.2 X1.4 | length 2470.9
  Top Layer w4: U3.F5 755.35,671.26 772.05,671.26 780.39,679.61 U3.C5 794.25,687.28 853.42,687.28 v1(853.94,687.8) ; U3.E3 U3.D2 786.22,719.13 786.22,703.39 U3.C4 794.25,687.8
  Top Layer w5: C14.1@912.99,724.21 C14.1
  Top Layer w8: X1.4@890.16,778.74 X1.2@927.64,816.22
  Top Layer w10: v1(19.68,637.8) 32.28,637.8 37.8,632.28 C5.2 37.8,603.94 v1(25.98,592.13) ; v1(107.09,433.46) C23.2 135,456.65 v1(135.43,457.09) ; U4.20 131.89,798.82 137.4,804.33 v1(177.17,804.33) ; C6.2 191.34,617.72 v1(191.73,618.11) ; U4.18 196.46,758.66 v1(197.64,757.48) ; v1(192.13,448.43) 192.52,448.03 C9.1 220.16,423.94 v1(220.47,423.62) ; v1(195.28,719.68) 196.06,720.47 C4.2 ; v1(213.78,536.61) 213.9,536.5 DS2.2 251.54,518.5 v1(274.02,518.5) ; C1.2 v1(247.4,906.54) 249.09,904.84 U5.16 ; U5.12 U5.13 ; v1(350.79,958.27) 350.39,957.87 C2.2 C3.2 349.92,927.87 v1(351.18,929.13) ; v1(841.34,568.9) 840.94,568.5 840.94,566.14 863.86,543.23 U2.4 ; v1(842.13,621.65) 843.31,620.47 C12.2 ; X1.4 890.16,774.25 X1.4@890.16,778.74 ; C16.1 939.65,695 v1(940.16,694.49) ; C10.1 950.75,665 v1(951.57,664.17) ; X1.2@927.64,816.22 X1.2 ; C13.2 964.76,625 v1(964.96,625.2)
  Top Layer w12: C22.2 160.12,126.65 v1(161.02,127.56) ; D4.2 161.1,185.12 v1(161.81,185.83) ; v1(209.06,213.39) 209.45,212.99 C19.1 v1(233.86,185.04) ; v1(242.91,246.85) 244.17,248.11 U6.2 ; U5.12 345.32,856.26 352.36,849.21 352.36,831.5 v1(353.15,830.71) ; U5.13 344.06,875.94 v1(344.09,875.98) ; v1(483.46,316.14) 484.25,315.35 U8.2 ; v1(484.65,400.39) 484.25,400.79 484.25,401.57 486.22,403.54 C21.2 507.48,425.2 v1(509.84,422.83) ; C20.2 485.04,196.85 v1(485.83,196.06) ; C7.2 588.52,226.32 v1(591.34,229.13) ; v1(605.91,259.84) 606.3,260.24 R13.1 v1@630.71,285.43 ; C25.2 636.22,358.27 v1(637.01,359.06) ; v1(622.44,228.35) 623.52,227.26 C8.2 ; v1(625.7,632.35) v1@627.49,632.35 ; v1@630.71,633.07 C18.2 ; v1(632.28,283.86) v1@630.71,285.43 ; v1(675.59,317.72) 677.44,315.87 U7.1 633.76,288.48 v1@630.71,285.43 ; v2(752.36,874.8) 752.76,874.41 v2(752.76,774.8) ; C12.2 843.31,601.97 v1(861.02,584.25) ; C11.1 v2(845,846.97) 857.09,859.06 925.98,859.06 ; C14.1 952.95,725 962.6,734.65 v2(962.6,793.31) v2(962.6,848.03) 951.57,859.06 925.98,859.06 ; X1.2 927.64,857.4 925.98,859.06
  Top Layer w20: D4.2 v1(157.48,220.2) v1(157.48,254.33) 157.48,295.28 v1(142.64,310.12) D1.1 ; U8.2 v1(484.25,239.37) 484.25,216.54 C20.2
  Bottom Layer w10: v1(245.67,357.87) 247.87,360.08 R11.1 313.74,383.03 v1(313.78,383.07)
  Bottom Layer w12: v1(398.03,527.56) 399.09,528.62 U1.4 425,499.02 v1(425.2,498.82) ; v1(622.83,790.16) 624.02,791.34 C24.2 v1(649.61,766.14)
  other v1: 192.91,39.37 677.17,66.93 779.53,66.93 858.27,66.93 188.98,98.43 397.64,118.11 614.17,122.05 547.24,125.98 830.71,137.8 925.2,137.8 330.71,169.29 393.7,181.1 330.71,224.41 397.64,224.41 413.39,326.77 161.42,421.26 563.78,569.29 220.47,622.05 334.69,665.39 459.84,733.46 490.55,732.68 428.74,734.65 525.98,736.61 471.26,766.14 420.87,768.9 377.95,818.9 29.92,829.92 31.5,877.95 114.17,909.45 114.17,960.63 173.23,960.63
  other v2: 939.76,724.41 962.99,753.15 798.03,756.69 751.57,813.39 800.79,822.05 751.97,845.28 801.18,846.06 821.26,845.67 918.5,871.26 950.79,870.87 801.57,872.44 827.56,871.65 857.48,872.05 888.19,871.65 726.38,890.94 725.98,917.32
GYRO_CS: R7.1 U3.E7 U4.22 | length 1081.4
  Top Layer w4: v1(57.87,585.83) 64.96,578.74 349.61,578.74 361.02,590.16 738.58,590.16 762.76,614.33 U3.E7
  Top Layer w8: U4.22 100.39,828.5 R7.1
  Bottom Layer w4: v1(57.87,585.83) 57.87,595.67 39.37,614.17 39.37,775.59 71.65,807.87 v1(101.97,807.87)
GYRO_INT1: U3.F7 U4.12 | length 655.8
  Top Layer w4: U4.12 226.97,658.46 282.28,603.15 727.56,603.15 747.01,622.6 U3.F7
GYRO_INT2: U3.F6 U4.19 | length 733.2
  Top Layer w4: U4.19 204.13,780.12 266.93,717.32 266.93,670.08 283.46,653.54 291.34,653.54 ; 287.4,653.54 291.34,653.54 ; U3.F6 739.37,656.22 739.37,634.25 719.29,614.17 330.71,614.17 291.34,653.54
I2C_SCL: R5.1 U2.6 U3.F3 U7.8 | length 643.9
  Top Layer w4: U3.F3@748.03,710.63 759.06,699.61 v2(770.87,699.61)
  Top Layer w5: U3.F3 U3.F3@747.76,710.35
  Top Layer w8: U2.6 v1@761.5,493.23 ; U7.8 785.83,341.75 785.83,468.9 v1@764.37,490.35
  Top Layer w12: R5.1 619.25,493.23 U2.6
  Bottom Layer w8: v1(766.14,492.13) 785.43,511.42 785.43,688.58 774.41,699.61 v2(770.87,699.61)
I2C_SDA: R6.1 U2.5 U3.G2 U7.7 | length 790
  Top Layer w4: v1(645.28,733.07) 659.45,718.9 723.31,718.9 U3.G2
  Top Layer w8: U2.5@706.57,541.73 772.05,541.73 804.72,509.06 804.72,325.59 764.57,285.43 764.57,255.51 755.22,246.16 U7.7
  Top Layer w12: R6.1 611.89,570.87 v1(641.73,570.87) 669.37,543.23 U2.5 U2.5@706.57,541.73
  Bottom Layer w8: v1(641.73,570.87) 645.67,574.8 645.67,732.68 v1(645.28,733.07)
IR_INT: R3.1 U3.E6 U7.6 | length 555.6
  Top Layer w4: U3.E6 770.47,656.14 770.47,598.82 828.35,540.94 828.35,327.17 783.52,282.34 R3.1
  Top Layer w12: U7.6 734.49,205.77 R3.1
NetC6_1: C6.1 U4.10 | length 49.8
  Top Layer w8: U4.10 116.14,619.72 C6.1@123.98,611.89
NetC17_2: C17.2 L1.1 U3.D1 | length 96.1
  Top Layer w8: U3.D1 778.74,742.83 L1.1
NetD3_1: D3.1 D4.1
NetDS1_1: DS1.1 R10.1 | length 57.1
  Top Layer w12: DS1.1 R10.1
NetDS1_2: DS1.2 U6.1 | length 260.6
  Top Layer w12: U6.1 206.77,320.79 217.87,331.89 305.51,331.89 322.05,315.35 322.05,268.5 331.69,258.86 DS1.2
NetDS2_1: DS2.1 R12.1 | length 50
  Top Layer w20: R12.1 DS2.1
NetR9_1: R9.1 U8.3 | length 118.6
  Top Layer w12: R9.1 521.65,184.06 U8.3
NetR11_2: R11.2 U6.5 | length 53
  Top Layer w12: v1(182.68,380.71) 183.11,380.28 U6.5
  Bottom Layer w12: v1(182.68,380.71) 208.15,380.71 R11.2
NetU2_1: U2.1 X2.2 | length 166.5
  Top Layer w12: X2.2 829.53,262.6 897.99,331.06 U2.1
NetU2_2: U2.2 X2.1 | length 258.9
  Top Layer w12: U2.2 949.69,443.23 961.81,431.1 961.81,304.72 927.95,270.87 X2.1
nRESET: P1.10 U3.B3
  other v2: 725.59,941.34
P0.02/AIN0: U3.C6
P0.03/AIN1: U3.D6
P0.12: U1.6 U3.H6 U4.23 U5.4 | length 898.5
  Top Layer w4: U4.23 82.68,782.09 82.68,844.88 95.28,857.48 158.27,857.48 198.86,816.89 U5.4 ; v2(603.17,656.22) 610.81,663.86 U3.H6
  Top Layer w5: U5.4 241.3,816.89 v1(248.03,823.62)
  Bottom Layer w4: v2(603.17,656.22) 603.17,761.83 604.72,763.39
  Bottom Layer w5: v1(248.03,823.62) 318.11,823.62 348.03,793.7 474.8,793.7 ; U1.6 475,793.9 474.8,793.7 ; 604.72,763.39 574.41,793.7 474.8,793.7
P0.13: U1.5 U3.G4 U4.24 U5.7 | length 876.6
  Top Layer w4: U4.24 68.9,853.54 85.83,870.47 v1(187.4,870.47) ; U5.7 268.78,851.85 v1(268.9,851.97) ; v1(442.52,831.1) 461.42,831.1 589.76,702.76 723.86,702.76 U3.G4
  Bottom Layer w4: v1(187.4,870.47) 233.07,870.47 ; U1.5@425.28,831.1 v1(442.52,831.1)
  Bottom Layer w5: 233.07,870.47 251.57,851.97 v1(268.9,851.97) 378.35,851.97 399.21,831.1 U1.5@425.28,831.1
P0.14: U1.2 U3.H5 U4.9 U5.6 | length 1226.2
  Top Layer w4: U4.9 100.39,605.12 106.3,599.21 240.55,599.21 v1(249.61,608.27) ; U5.6@248.43,790.16 249.61,788.98 v1(249.61,766.14) ; v1(267.32,547.64) 351.57,547.64 v1(375.98,572.05) ; v1(375.59,695.28) 391.26,679.61 U3.H5
  Bottom Layer w4: v1(249.61,766.14) v1(249.61,608.27) 249.61,565.35 v1(267.32,547.64)
  Bottom Layer w5: v1@375.59,570.47 389.76,556.3 517.72,556.3 525,549.02 U1.2 ; v1@375.59,572.05 v1(375.59,695.28)
P0.15: R2.1 U1.3 U3.H4 | length 782.3
  Top Layer w4: v1(386.61,744.09) 435.35,695.35 U3.H4
  Bottom Layer w4: 354.33,597.24 354.33,711.81 v1(386.61,744.09) ; U1.3 474.8,528.82 U1.3@475.98,530
  Bottom Layer w5: 354.33,597.24 354.33,524.02 398.35,480 R2.1 475,487.28 U1.3
P0.16: R4.1 U1.7 U3.H3 | length 305.6
  Top Layer w4: R4.1@524.41,835.83 526.38,833.86 526.38,796.85 612.13,711.1 U3.H3
  Top Layer w8: v1(505.91,830.71) 519.29,830.71 R4.1@524.41,835.83
  Bottom Layer w8: v1(505.91,830.71) 522.76,830.71 524.41,832.36 525.2,831.57 U1.7
P0.17: P1.4 U3.F1 U3.G3 | length 268.9
  Top Layer w4: U3.G3 738.98,718.82 738.98,734.57 U3.F1
  Top Layer w6: 630,925 726.38,828.62 726.38,776.77 747.01,756.14 U3.F1
P0.18: P1.2 R14.1 U3.G1 U3.H2 | length 327.5
  Top Layer w6: 413.02,965.47 472.67,905.82 513.02,905.82 ; 630,865.35 657.09,865.35 705.12,817.32 705.12,777.95 731.26,751.81 U3.G1 U3.H2
P0.21: R13.2 U2.7 U3.H1 | length 309.8
  Top Layer w8: R13.2 637.8,320.87 667.32,350.39 746.85,350.39 766.93,370.47 766.93,433.07 757.87,442.13 U2.7@706.18,442.13
  Top Layer w12: U2.7 U2.7@706.18,442.13
P0.22: U3.F2
P0.23: U3.E2
P0.24: U3.E1
P0.26: U3.D3
P0.27: U3.B4
P0.28/AIN4: U3.A3
P0.29/AIN5: U3.A4
P0.30/AIN6: U3.A5
P0.31/AIN7: U3.B5
RF: E1.1 L1.2 | length 74
  Top Layer w8: L1.2 E1.1
VBAT: C19.2 C20.1 P2.1 P3.1 R9.2 U6.3 U8.1 | length 669.3
  Top Layer w20: P2.1 281.57,137.87 U6.3
  Top Layer w25: P2.1 308.11,60 P3.1@464.57,60 ; U8.1 446.85,184.06 R9.2 465.55,60.98 P3.1@464.57,60 ; P3.1@495,60 P3.1@464.57,60
VBUS: C9.2 C23.1 D1.2 D2.2 R10.2 R12.2 U6.4 | length 434.3
  Top Layer w20: 66.93,488.19 267.72,488.19 ; U6.4 268.19,393.66 C9.2 268.19,487.72 267.72,488.19 ; R10.2 327.76,488.19 267.72,488.19
XC1: C14.2 U3.B2 X1.1 | length 159.4
  Top Layer w4: U3.B2 818.09,734.94 876.28,734.94 C14.2 ; C14.2@890.35,725 C14.2 ; X1.1 927.64,744.29 922.77,739.42 902.32,739.42 887.9,725 C14.2
XC2: C11.2 U3.A1 X1.3 | length 110.3
  Top Layer w5: C11.2 855.04,796.22
  Top Layer w6: U3.A1 845,761.85 C11.2 ; 855.04,796.22 X1.3
pads on no net: E1.2 P1.6 P1.7 P1.8 P1.9 U3.B6 U3.C3 U3.C7 U3.D7 U4.1 U4.2 U4.3 U4.4 U4.5 U4.6 U4.7 U4.11 U4.14 U4.15 U4.16 U4.17 U4.21 U5.2 U5.3 U5.5 U5.10 U5.15 U8.4

## Polygon pours and split planes (outlines as drawn)
GND on Bottom Layer "Top Layer-No Net" (solid, remove dead copper, pour order 2): -39.37,1015.75 996.06,1015.75 996.06,19.68 1059.06,-43.31 1047.24,-55.12 15.75,-55.12 -39.37,-55.12 -74.8,-19.68 -59.06,-3.94 -59.06,885.83 -59.06,992.13 -39.37,1011.81 -39.37,1015.75 -31.5,1023.62
GND on Top Layer "Top Layer-No Net" (solid, remove dead copper, pour order 4): -39.37,1035.43 -27.56,1047.24 1039.37,1047.24 1039.37,11.81 1019.68,-7.87 984.25,-43.31 23.62,-43.31 -3.94,-43.31 -43.31,-3.94 -74.8,27.56 -74.8,925.2 -74.8,996.06 -35.43,1035.43

## Keep-outs
Keep-Out Layer:
  circle w3.94: c59.06,929.13 r19.68
  circle w3.94: c925.2,55.12 r19.68
  lines w3.94: 0,23.62 ccw(c23.62,23.62) 23.62,0 960.63,0 ccw(c960.63,23.62) 984.25,23.62 984.25,960.63 ccw(c960.63,960.63) 960.63,984.25 23.62,984.25 ccw(c23.62,960.63) 0,960.63 0,23.62

## Other copper
Top Layer:
  rectangle net VBUS: 31.5,370.08 82.68,566.93
  rectangle net VBUS: 35.43,370.08 137.8,405.51
  rectangle net NetD3_1: 43.31,244.09 133.86,283.46
  rectangle net GND: 98.43,27.56 145.67,196.85
  rectangle net COIL1: 39.37,27.56 86.61,196.85
  pour cut-out: 859.25,849.95 953.35,849.95 953.35,736.94 859.05,736.94
  pour cut-out: 799.21,208.66 968.5,208.66 972.44,212.6 972.44,444.88 956.69,460.63 846.46,460.63 834.65,448.82 834.65,326.77 799.21,291.34
  pour cut-out: 761.81,900 792.91,900 792.91,736.61 792.13,735.83 761.81,735.83 761.81,888.19
Multi-Layer:
  pour cut-out: 740.94,982.68 987.01,982.68 987.01,889.76 982.28,885.04 739.76,885.04 739.76,981.5

## Silkscreen, mask and mechanical layers (free items; w line width, h text height)
Top Solder:
  rectangle: 102.36,27.56 145.67,70.87
  rectangle: 39.37,27.56 82.68,70.87